# Altium PCB Bop_It.PcbDoc
Units mm, origin at the board's own origin, x right, y up, seen from the top; angles counter-clockwise.
Board outline 37 x 44 mm, 4 copper layers (Top Layer, Ground Plane, Power Plane, Bottom Layer), stack 0.776 mm thick; 13 components, 26 nets, 57 pads, 38 vias.
Unrouted connection lines stored in the file: 10.
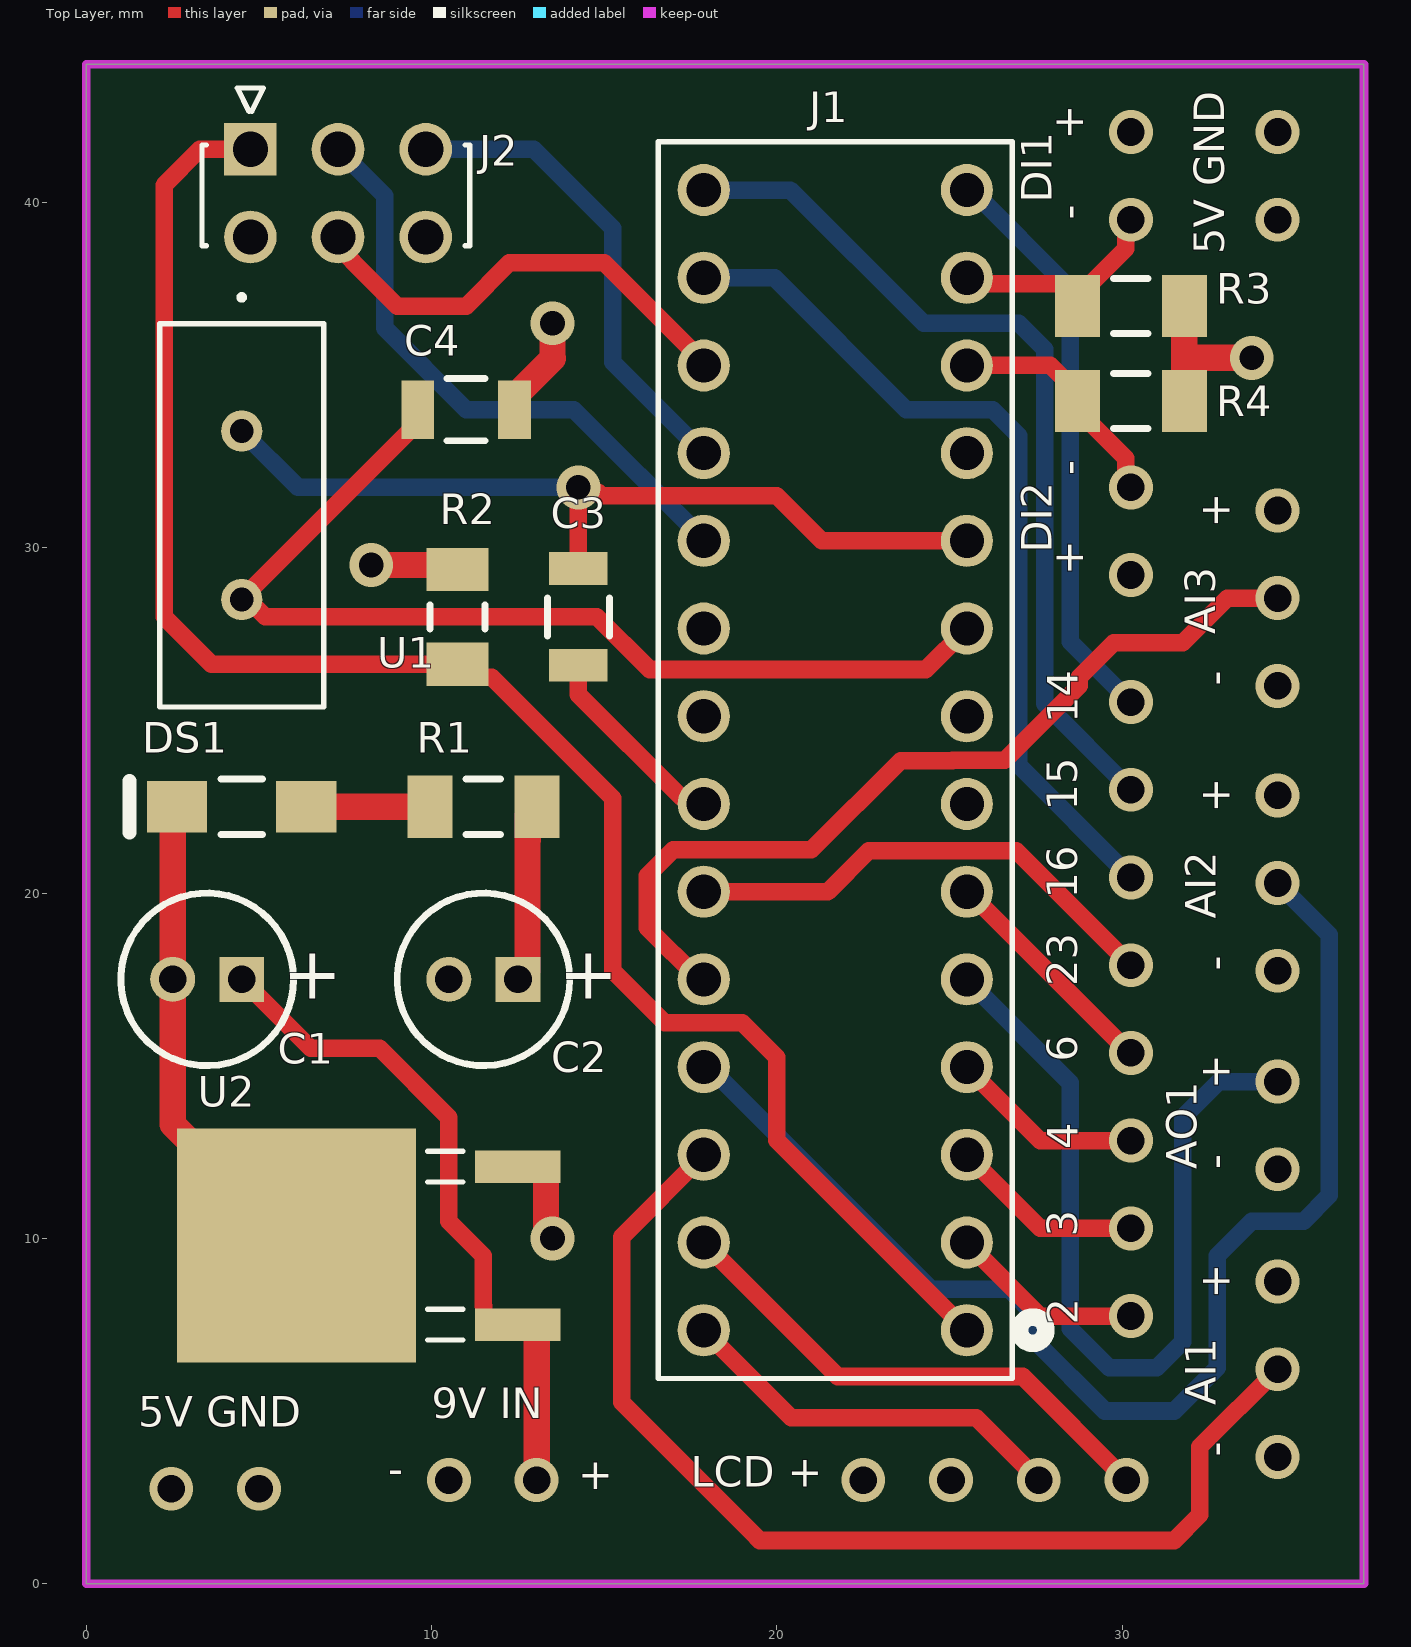
[diagram p0: Top Layer view]
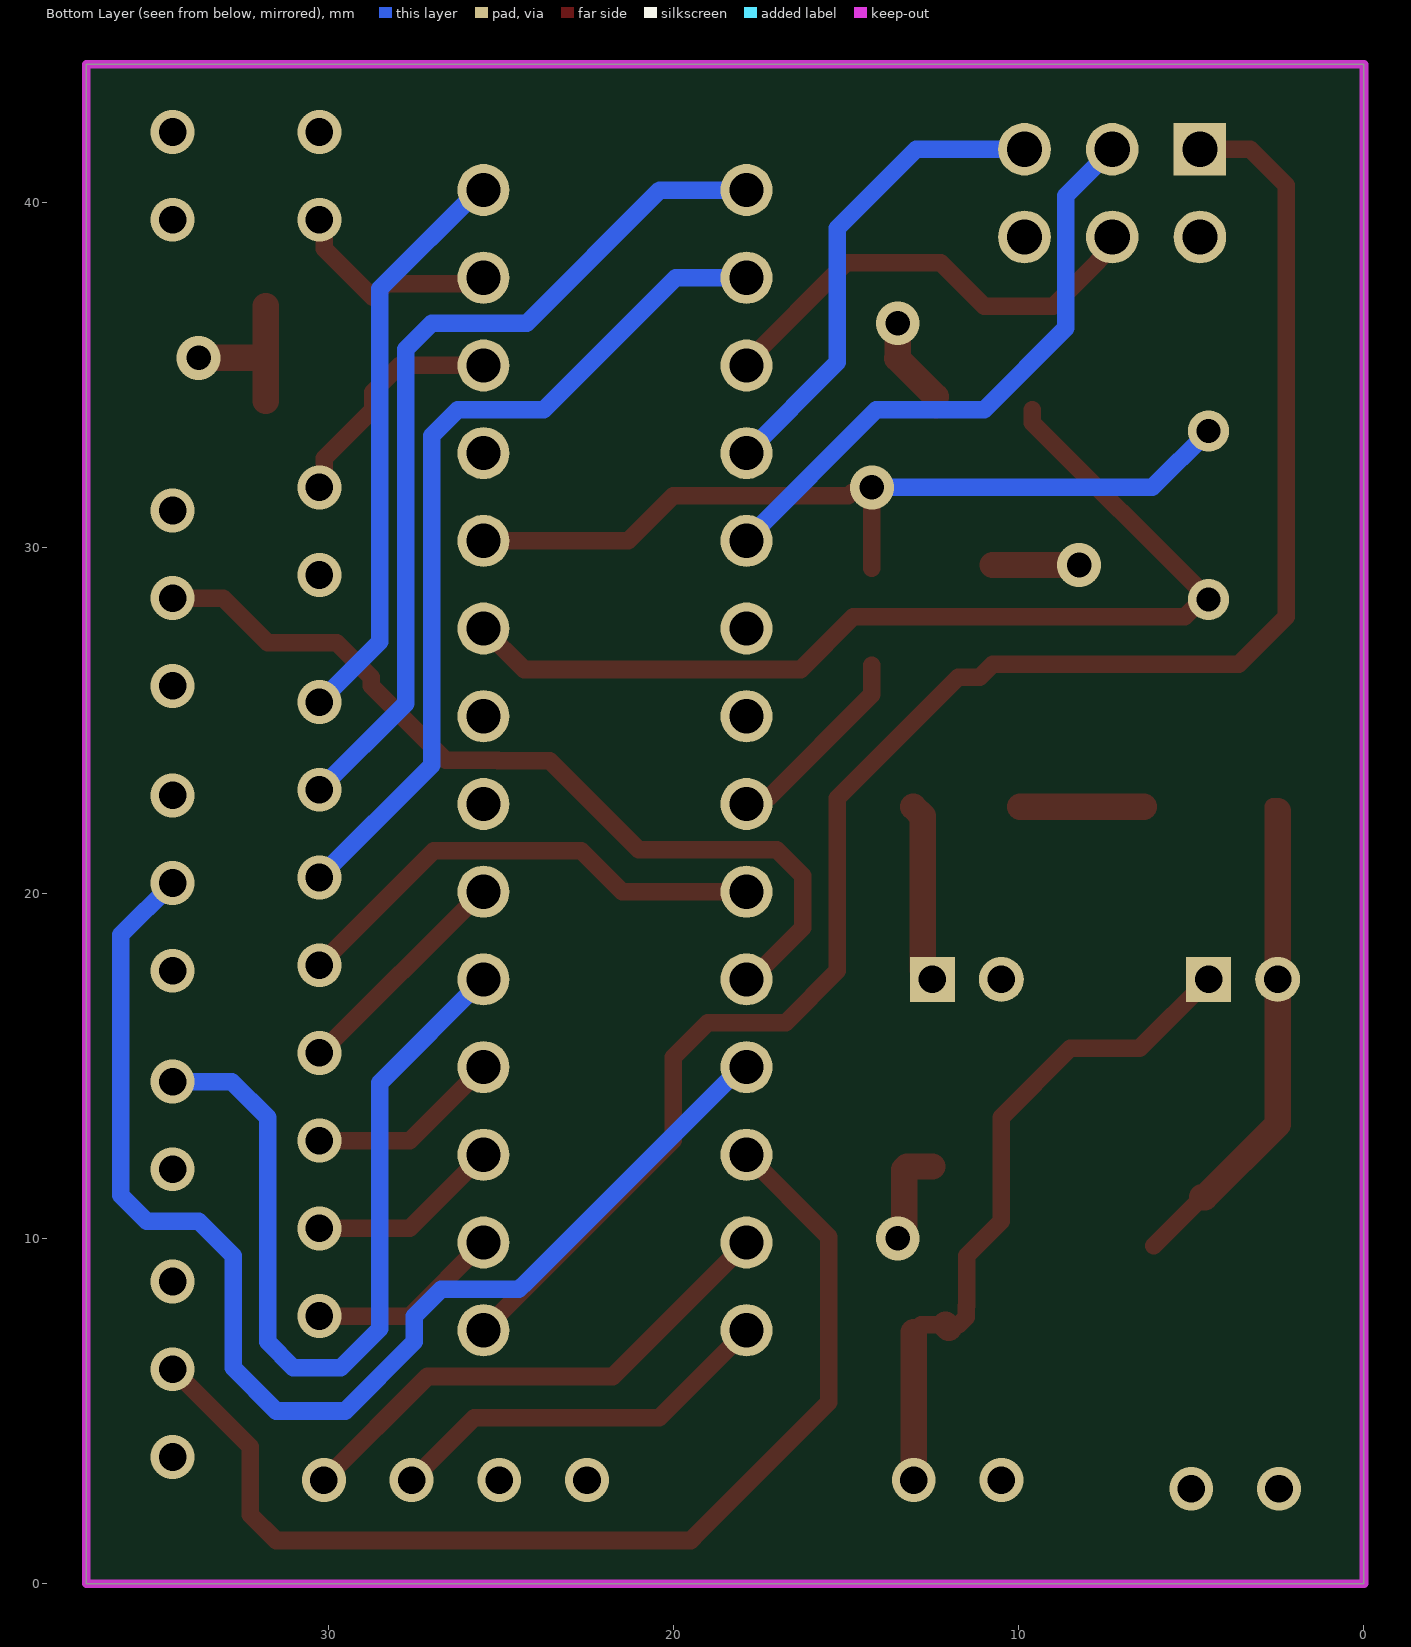
[diagram p1: Bottom Layer view, seen from below]
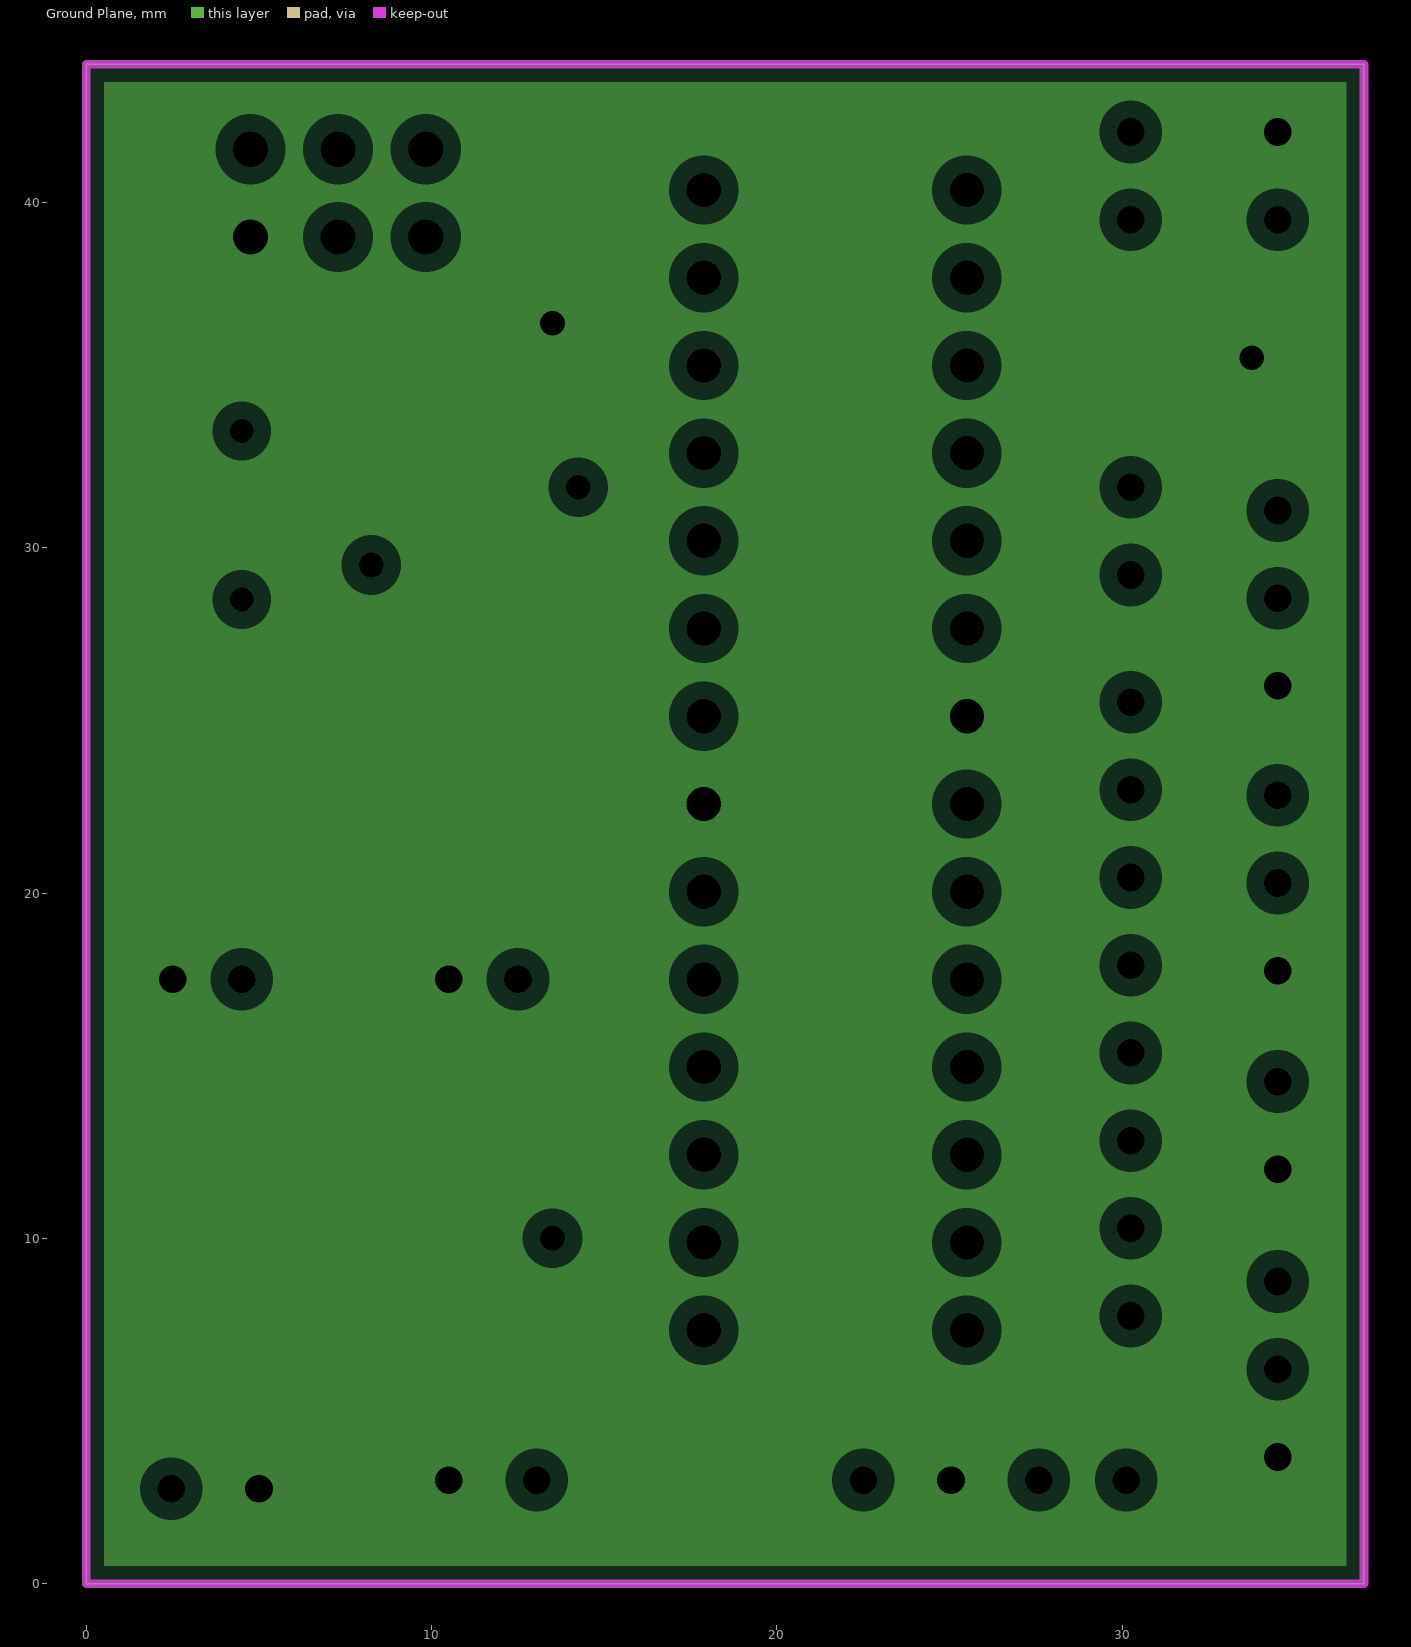
[diagram p2: Ground Plane, clearances drawn from the general rule]
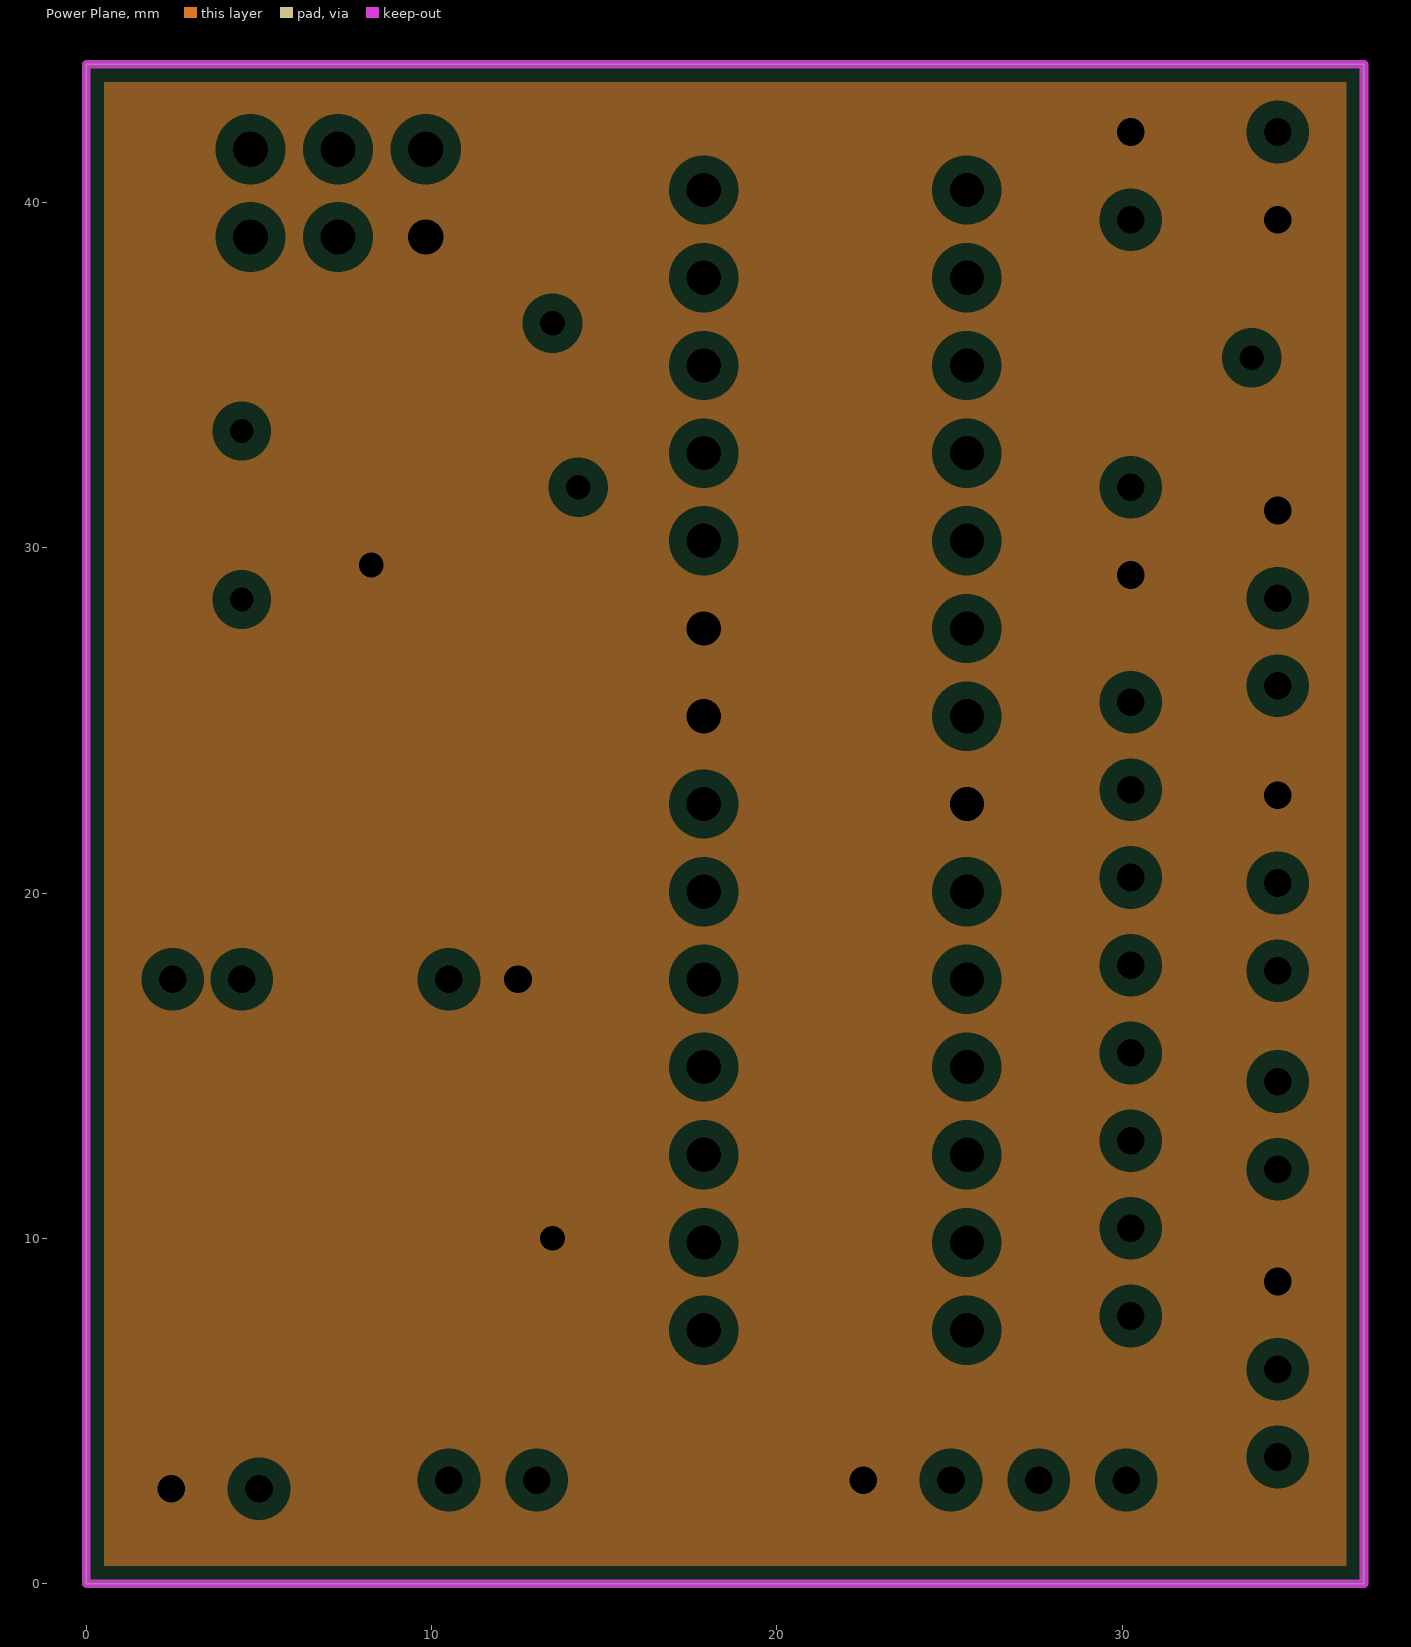
[diagram p3: Power Plane, clearances drawn from the general rule]

## Layer stack, top to bottom
Top Solder: solder mask 0.0102, Solder Resist, Dk 3.5
Top Layer: signal copper 0.0356
Dielectric 2: prepreg 0.254, PP-006, Dk 4.1
Ground Plane: plane copper 0.035, net GND
Dielectric 1: dielectric 0.127, FR-4, Dk 4.8
Power Plane: plane copper 0.035, net 5V
Dielectric 3: prepreg 0.254, PP-006, Dk 4.1
Bottom Layer: signal copper 0.0356
Bottom Solder: solder mask 0.0102, Solder Resist, Dk 3.5

## Board outline
0,0 37,0 37,44 0,44

## Design rules (kind name [scope] priority, off if disabled: settings)
BoardOutlineClearance [All] p1: gap=0.305 ignorepadtopadclearanceinfootprint=FALSE
Clearance [All] p1: gap=0.178 ignorepadtopadclearanceinfootprint=TRUE except(0.61: Arc-Via Track-Via SMDPad-Via THPad-Via Via-Via Via-Fill Via-Poly Via-Region Via-Text Via-Hole)
DiffPairsRouting [All] p1: maxlimit=0.254 minlimit=0.178 mostfreqgap=0.254 toplayer_minwidth=0.152 toplayer_maxwidth=0.381 toplayer_prefwidth=0.203 bottomlayer_minwidth=0.152 bottomlayer_maxwidth=0.381 bottomlayer_prefwidth=0.203 maxuncoupledlength=12.7
HoleToHoleClearance [All] p1: gap=0.432 allowstackedmicrovias=TRUE
NetAntennae [InNet('No Net')] p1: netantennaetolerance=0
PlaneClearance [All] p1: clearance=0.508
PlaneConnect [All] p1: planeconnectstyle=Relief reliefexpansion=0.508 reliefentries=4 reliefconductorwidth=0.254 reliefairgap=0.254
PolygonConnect [All] p1: connectstyle=Relief reliefconductorwidth=0.254 reliefentries=4 polygonreliefangle="90 Angle" airgapwidth=0.254
RoutingVias [All] p1: holewidth=0.762 width=0.889 viastyle="Through Hole" minholewidth=0.254 minwidth=0.279 maxholewidth=6.477 maxwidth=6.35
SilkToSilkClearance [All] p1: silktosilkclearance=0
SolderMaskExpansion SolderMaskExpansion_1 [All] p1: expansion=0.102 istentingtop=FALSE
Width [All] p1: maxlimit=254 minlimit=0.178 preferedwidth=0.508 minimp=50.000000 maximp=50.000000 favimp=50.000000
24 further rules are at their usual default settings.

## Components (designator, comment, footprint, x,y, rotation, side; value= is the part's Value field where it differs from the comment)
C1 "10uF" CAPPR55-200-1100X500X1200 3.5,17.5 r180 top
C2 "10uF" CAPPR55-200-1100X500X1200 11.5,17.5 r180 top
C3 "22pF" FP-C1206C-EB-MFG 14.25,28 r90 top value="22 pF"
C4 "22pF" FP-C1206C-EB-MFG 11,34 r180 top value="22 pF"
DS1 "GRN LED" KING-APTD3216CGCK_V 4.5,22.5 r180 top
J1 "ATMega328" CONN28_1-2199298-9_TEC 25.5,7.34 r90 top
J2 "AVR" CON50_1X50_P100RM_HDR_TYC 4.75,41.54 r0 top
R1 "220" RESC3216X60X45ML10T20 11.5,22.5 r180 top
R2 "10k" RESC3116X65X50NL20T20 10.75,28 r270 top
R3 "100" RESC3216X60X45ML10T20 30.25,37 r180 top
R4 "100" RESC3216X60X45ML10T20 30.25,34.25 r180 top
U1 "16MHz" ATS08A-E_CTS 4.5,33.38 r270 top
U2 "5VREG" DPAK-3_ONS 6.087,9.79 r90 top

## Footprints (in the part's own frame and the unit in brackets; to place one, negate y for a bottom-side part, rotate by r counter-clockwise, add the part's x,y. Pads: shape width x height; smd on the part's side, far side on the other; paste and mask are expansions set on the pad)
ATS08A-E_CTS [mil]
  round 47 hole 27 mask+0: 1(0,0) 2(192.13,0)
  silkscreen extent -155,-94 315,93, body extent 0,0 10,10, height 10
CAPPR55-200-1100X500X1200 [mm] "THD, 2-Leads, Dia 5mm, Body Length 11mm"
  rect 1.3x1.3 hole 0.8: 1(-1,0)
  round 1.3 hole 0.8: 2(1,0)
  silkscreen extent -2.5,-2.5 2.5,2.5, body extent -2.5,-2.5 2.5,2.5, height 12
CON50_1X50_P100RM_HDR_TYC [mil]
  rect 60x60 hole 40 mask+0: 1(0,0)
  round 60 hole 40 mask+0: 2(100,0) 3(200,0) 4(0,-100) 5(100,-100) 6(200,-100)
  silkscreen extent -55,-110 250,70, body extent 0,0 10,10, height 10
CONN28_1-2199298-9_TEC [mil]
  round 59.37 hole 39 mask+0: 1(0,0) 2(100,0) 3(200,0) 4(300,0) 5(400,0) 6(500,0) 7(600,0) 8(700,0) 9(800,0) 10(900,0) 11(1000,0) 12(1100,0) 13(1200,0) 14(1300,0) 15(0,300) 16(100,300) 17(200,300) 18(300,300) 19(400,300) 20(500,300) 21(600,300) 22(700,300) 23(800,300) 24(900,300) 25(1000,300) 26(1100,300) 27(1200,300) 28(1300,300)
  silkscreen extent -55,-90 1355,352, body extent 0,0 10,10, height 10
DPAK-3_ONS [mil]
  rect 36.97x97.56 smd paste+0 mask+0: 1(-90.16,-252.5) 3(90.16,-252.5)
  rect 267x273 smd paste+0 mask+0: 2(0,0)
  silkscreen extent -108,-190 108,-150, body extent 0,0 10,10, height 10
FP-C1206C-EB-MFG [mm]
  rect 0.95x1.7 smd paste+0 mask+0: 1(-1.4,0) 2(1.4,0)
  silkscreen extent -0.55,-0.9 0.55,0.9, body extent -2,-1 2,1, height 0.25
KING-APTD3216CGCK_V [mm] "SMD, 2-Leads, Body 3.2x1.6mm"
  rect 1.75x1.5 smd: 1(-1.875,0) 2(1.875,0)
  silkscreen extent -0.6,-0.8 3.25,0.8, body extent -1.6,-0.8 1.6,0.8, height 1.8
RESC3116X65X50NL20T20 [mm] "Chip Resistor, 2-Leads, Body 3.10x1.60mm, IPC Medium Density"
  rect 1.25x1.8 smd: 1(-1.375,0) 2(1.375,0)
  silkscreen extent -0.35,-0.8 0.35,0.8, body extent -1.65,-0.9 1.65,0.9, height 0.65
RESC3216X60X45ML10T20 [mm] "Chip Resistor, 2-Leads, Body 3.20x1.60mm, IPC Low Density"
  rect 1.3x1.8 smd: 1(-1.55,0) 2(1.55,0)
  silkscreen extent -0.5,-0.8 0.5,0.8, body extent -1.65,-0.85 1.65,0.85, height 0.6

## Part data
C1 C2: library part CMP-2100-03622-1, "Aluminum Electrolytic Capacitor, 10 uF, +/- 20%, 50 V, -40 to 85 degC, 2-Pin THD, RoHS, Bulk", Case/Package=Radial, Dielectric Material=Aluminium, Leakage Current=3uA, Manufacturer=Panasonic, Max Operating Temperature=85degC, Min Operating Temperature=-40degC, Package Description="2-Pin Radial Lead, Dia 5 mm, Height 12 mm", Package Quantity=200, Package Reference=CAPPR55-200-1100X500X1200, Ripple Current=65mA, Tolerance=20%, Voltage=50V, Capacitance=10uF, Datasheet URL=https://industrial.panasonic.com/cdbs/www-data/pdf/RDF0000/ABA0000C1218.pdf, Datasheet Version="Rev. 05, 10/2016", Diameter=5mm, Dissipation Factor=0.12%, Height=11mm, Height - Seated (Max)=0.472inch, Lead Diameter=0.5mm, Lead Free=LeadFree, Lead Pitch=2mm, Lead/Base Style=Straight, Length=11mm, Life (Hours)=2000Hour, Manufacturer URL=http://www.panasonic.com/, Mount=ThroughHole, Number of Pins=2, Packaging=Bulk, Radiation Hardening=No, REACH SVHC=NoSVHC, Ripple Current (AC)=65mA, RoHSCompliant=true, Termination=Radial, Voltage Rating=50V, Voltage Rating (DC)=50V
C3 C4: library part CMP-03020-001476-1, "1206 22pF Ceramic Multilayer Capacitor; 50VDC; 125degC; C0G Dielec; +/-5% SMD", Capacitance="22 pF", Manufacturer=KEMET, Manufacturer Part Number=C1206C220J5GACTU, Package=C1206C-EB, Temperature="-55°C to +150°C", Temperature Characteristic=C0G, Temperature Coefficient=15%, Temperature Range High=+150°C, Temperature Range Low=-55°C, Tolerance=0.05, Voltage Rating="50 V", Automotive=Yes, Automotive Grade="Grade 0", Category=Cap, ComponentLink2Description=Datasheet, ComponentLink2URL=https://content.kemet.com/datasheets/KEM_C1007_X8R_ULTRA_150C_SMD.pdf, Device Class L1="Passive Components", Device Class L2=Capacitors, Device Class L3="Ceramic Capacitors", Digikey Description="1206 22pF Ceramic Multilayer Capacitor; 50VDC; 125degC; C0G Dielec; +/-5% SMD", Height=0.88mm, Ipc Land Pattern Name=CAPC320160X78, Lead Free=Yes, Material=Ceramic, Mouser Description="1206 22pF Ceramic Multilayer Capacitor; 50VDC; 125degC; C0G Dielec; +/-5% SMD", Octopart=https://octopart.com/c1206c220j5gactu-kemet-131912, RoHS=TRUE
DS1: library part CMP-2000-05792-1, "Chip LED Lamp, Green, 5 V, 30 mA, -40 to 85 degC, 2-Pin SMD, RoHS, Tape and Reel", Color=Green, Current - Test=20mA, Manufacturer=Kingbright, Millicandela Rating=300mcd, Package / Case=1206(3216Metric), Package Description="2-Pin Surface Mount Device, Body 3.2 x 1.6 mm", Package Reference=APTD3216CGCK, Standard Package=2,000, Voltage - Forward (Vf) (Typ)=2.1V, 3D Model="APTD3216x.sldprt /  / APTD3216x.pro /  / APTD3216x.igs /  / APTD3216x.stp", Catalog Drawings="APTD3216SeriesTop /  / APTD3216SeriesSide", Category=Optoelectronics, Datasheet URL=https://www.kingbrightusa.com/images/catalog/spec/APTD3216CGCK.pdf, Datasheet Version="Rev. V.17B, 04/2015", Family=LEDIndication-Discrete, Height=1.80mm, Lens Style/Size=RoundwithDomedTop,1.6mm, Lens Type=Clear, Manufacturer URL=http://www.kingbright.com/, Mounting Technology=SurfaceMount, Mounting Type=SurfaceMount, Online Catalog=3.2mmx1.6mmRoundwithDomedTop1206PackageLEDs, Other Names=754-1152-2, Packaging=Tape&Reel(TR), Size / Dimension=3.20mmLx1.60mmW, Viewing Angle=50°, Wavelength - Dominant=570nm, Wavelength - Peak=574nm
J1: library part 1-2199298-9, "28P,DIP SKT,300 CL,LDR,PB FREE", Built_By=Digital_Papaya_Team, Copyright="Copyright (C) 2018 Accelerated Designs. All rights reserved", Datasheet=https://www.te.com/commerce/DocumentDelivery/DDEController?Action=showdoc&DocId=Customer+Drawing%7F2199298%7FA%7Fpdf%7FEnglish%7FENG_CD_2199298_A_baseFilename.pdf%7F1-2199298-1, Manufacturer_Part_Number=1-2199298-9, PITCH(MM)=2.54, POSITIONS=28, PRODUCT=Socket, RefDes=RefDes, ROWS/CONFIG=2, SourceLibrary=TE-Connectivity_250_Part_Delivery_10_2019-04-09, TE_Part_Number=1-2199298-9, Type=DEV, Vendor="TE Connectivity"
J2: library part 5-826631-0, "No Description Available", Built_By=EMA_UL_Team, Copyright="Copyright (C) 2018 Accelerated Designs. All rights reserved", Manufacturer_Part_Number=5-826631-0, RefDes=RefDes, SourceLibrary=Tyco_2012-04-26, Type=DEV, Vendor="TE Connectivity"
R1: library part CMP-2003-01956-1, Manufacturer="Vishay Dale", Part Number=CRCW1206220RFKEA
R2: library part CMP-2003-04883-1, Manufacturer="Vishay Dale", Part Number=CRCW120610K0FKEAHP
R3 R4: library part CMP-2003-04801-1, Manufacturer="Vishay Dale", Part Number=CRCW1206100RFKEA
U1: library part ATS08A-E, "No Description Available", Built_By=EMA_Colton, Copyright="Copyright (C) 2018 Accelerated Designs. All rights reserved", Datasheet=https://www.ctscorp.com/wp-content/uploads/ATS-ATSSM.pdf, Manufacturer_Part_Number=ATS08A-E, RefDes=RefDes, SourceLibrary=Add_to_database_2020-10-15, Type=DEV, Vendor="CTS Components"
U2: library part MC7805BDTRKG, "No Description Available", Copyright="Copyright (C) 2016 Accelerated Designs. All rights reserved", Manufacturer_Part_Number=MC7805BDTRKG, RefDes=RefDes, SourceLibrary=ONSemi_2017-12-12_5, Type=DEV, Vendor="ON Semiconductor"

## Via types
v1: diameter 1.27, hole 0.8, Top Layer to Bottom Layer, 33 vias
v2: diameter 1.27, hole 0.711, Top Layer to Bottom Layer, 5 vias

## Nets (pads, with @x,y where several pads share a name; then routed paths per layer and width w, separated by ;. In a path a pad name is that pad's centre, name@x,y a point inside that pad or via, vN(x,y) a via of type N, cw(c..) or ccw(c..) an arc to the next point about the centre after c; other vN are vias at no path point)
5V: C2.1 J1.7 J1.22 J1.23 J2.6 R1.1 R2.1 U2.3 | length 10.6
  Top Layer w0.508: C2.1 C2.1@12.775,17.775
  Top Layer w0.762: v2(8.25,29.5) R2.1@10.75,29.5 ; U2.3 13.225,12.08 13.314,11.992 13.314,10.324 13.5,10.137 v2(13.5,10) ; C2.1@12.775,17.775 12.775,21.535 12.781,21.541 12.781,22.231 R1.1
  other v1: 2.46,2.75 22.5,3 34.5,8.75 34.5,22.83 30.25,29.21 34.5,31.08 34.5,39.5 30.25,42.04
9V: C1.1 U2.1 | length 20
  Top Layer w0.508: C1.1 6.5,15.5 8.5,15.5 10.5,13.5 10.5,10.5 11.5,9.5 11.5,8.052 11.515,8.037 11.515,7.715 11.731,7.5 12.117,7.5 U2.1 12.824,7.5 U2.1@13.04,7.284
  Top Layer w0.762: U2.1@12.029,7.411 U2.1@12.117,7.5 ; v1(13.04,3) U2.1@13.04,7.284
APushIn: J1.13 R3.2 | length 6.3
  Top Layer w0.508: J1.13 25.674,37.646 28.304,37.646 28.7,37.25 30.104,38.654 30.104,39.354 v1(30.25,39.5)
GND: C1.2 C2.2 C3.1 C4.1 DS1.2 J1.8 J1.21 J2.4 R3.1 R4.1 U2.2 | length 27.8
  Top Layer w0.508: DS1.2@2.5,22.375 DS1.2 ; U2.2@4.688,11.188 U2.2 ; C4.1 C4.1@12.4,34.375 ; C3.1 14.25,25.75 17.229,22.771 17.689,22.771 J1.21
  Top Layer w0.762: DS1.2@2.5,22.375 C1.2 2.5,13.3 4.612,11.188 U2.2@4.688,11.188 ; C4.1@12.4,34.375 13.513,35.487 ; 13.5,35.5 v2(13.5,36.5) ; R4.1 31.8,35.625 ; R3.1 31.8,35.625 ; v2(33.75,35.5) 31.925,35.5 31.8,35.625
  other v1: 5,2.75 10.5,3 25.04,3 34.5,3.67 34.5,12 34.5,17.75 34.5,26 34.5,42.04
JPushIn: J1.12 R4.2 | length 6.9
  Top Layer w0.508: J1.12 27.92,35.28 28.7,34.5 R4.2 28.7,34 30.104,32.596 30.104,31.896 v1(30.25,31.75)
JXIn: J1.18 | length 36.8
  Bottom Layer w0.508: J1.18 18.04,14.96 24.251,8.749 24.474,8.526 26.724,8.526 27.5,7.75 27.5,7 29.5,5 31.5,5 32.75,6.25 32.75,9.5 33.75,10.5 35.25,10.5 36,11.25 36,18.79 v1(34.5,20.29)
JYIn: J1.19 | length 25.5
  Top Layer w0.508: J1.19 17.75,17.5 16.25,19 16.25,20.5 17,21.25 21,21.25 23.579,23.829 25.072,23.829 25.088,23.845 26.595,23.845 28.751,26.001 28.751,26.251 29.75,27.25 31.75,27.25 33.04,28.54 v1(34.5,28.54)
NetC3_2: C3.2 J1.10 U1.1 | length 24.7
  Top Layer w0.508: C3.2 v2(14.25,31.75) 14.396,31.604 14.824,31.604 14.929,31.5 20,31.5 21.3,30.2 25.4,30.2 25.45,30.25 J1.10
  Bottom Layer w0.508: U1.1 6.13,31.75 v2(14.25,31.75)
NetC4_2: C4.2 J1.9 U1.2 | length 29.9
  Top Layer w0.508: C4.2 9.6,33.625 4.5,28.525 U1.2 4.686,28.5 5.028,28.157 5.186,28 14.786,28 16.311,26.474 24.314,26.474 J1.9
NetDS1_1: DS1.1 R1.2 | length 3.6
  Top Layer w0.762: DS1.1 R1.2
NetJ1_1: J1.1 J2.1 R2.2 | length 51.6
  Top Layer w0.508: J2.1 3.29,41.54 2.25,40.5 2.25,28 3.625,26.625 R2.2 11.121,26.254 11.746,26.254 15.25,22.75 15.25,17.75 16.75,16.25 19,16.25 20,15.25 20,12.84 J1.1
NetJ1_24: J1.24 J2.2 | length 17.6
  Bottom Layer w0.508: J2.2 8.636,40.194 8.636,36.364 11,34 14.119,34 17.88,30.239 J1.24
NetJ1_25: J1.25 J2.3 | length 14
  Bottom Layer w0.508: J2.3 12.96,41.54 15.25,39.25 15.25,35.37 J1.25
NetJ1_26: J1.26 J2.5 | length 13.4
  Top Layer w0.508: J2.5 7.29,38.725 7.715,38.3 7.715,38.285 9,37 11,37 12.25,38.25 15,38.25 17.88,35.37 J1.26
Pin2: J1.2 | length 5.6
  Top Layer w0.508: J1.2 27.63,7.75 v1(30.25,7.75)
Pin3: J1.3 | length 5.6
  Top Layer w0.508: J1.3 27.63,10.29 v1(30.25,10.29)
Pin4: J1.4 | length 5.6
  Top Layer w0.508: J1.4 27.63,12.83 v1(30.25,12.83)
Pin6: J1.6 | length 6.7
  Top Layer w0.508: J1.6 25.54,20.04 30.21,15.37 v1(30.25,15.37)
Pin14: J1.14 | length 16.9
  Bottom Layer w0.508: J1.14 25.64,40.36 28.5,37.5 28.5,27.28 v1(30.25,25.53)
Pin15: J1.28 | length 25.6
  Bottom Layer w0.508: J1.28 20.39,40.36 24.25,36.5 27,36.5 27.75,35.75 27.75,25.49 v1(30.25,22.99)
Pin16: J1.27 | length 25.2
  Bottom Layer w0.508: J1.27 19.93,37.82 23.75,34 26.25,34 27,33.25 27,23.7 v1(30.25,20.45)
Pin23: J1.20 | length 14.2
  Top Layer w0.508: J1.20 21.478,20.04 22.664,21.226 26.934,21.226 v1(30.25,17.91)
SCL: J1.15 | length 11.5
  Top Layer w0.508: J1.15 20.409,4.811 25.769,4.811 v1(27.58,3)
SDA: J1.16 | length 15.1
  Top Layer w0.508: J1.16 21.76,6 27.12,6 v1(30.12,3)
SpeakOut: J1.5 | length 25.1
  Bottom Layer w0.508: J1.5 28.5,14.5 28.5,7.381 29.629,6.251 31.001,6.251 31.75,7 31.75,13.5 32.79,14.54 v1(34.5,14.54)
SPotIn: J1.17 | length 32
  Top Layer w0.508: J1.17 15.5,10.04 15.5,5.25 19.251,1.499 19.5,1.25 31.5,1.25 32.25,2 32.25,3.96 v1(34.5,6.21)
pads on no net: J1.11

## Polygon pours and split planes (outlines as drawn)
GND on Ground Plane (split plane): 36.49,43.49 36.49,0.51 0.51,0.51 0.51,43.49
5V on Power Plane (split plane): 36.49,43.49 36.49,0.51 0.51,0.51 0.51,43.49

## Keep-outs
Keep-Out Layer:
  the board outline again, w0.254

## Silkscreen, mask and mechanical layers (free items; w line width, h text height)
Top Overlay:
  text "DI1" at 28.25,39.99 h1.5 r90
  text "-     +" at 29.155,39.5 h1.5 r90
  text "5V GND" at 33.25,38.5 h1.5 r90
  text "DI2" at 28.25,29.85 h1.5 r90
  text "+     -" at 29.155,29.21 h1.5 r90
  text "AI3" at 32.983,27.5 h1.5 r90
  text "-           +" at 33.405,26 h1.5 r90
  text "14" at 29,24.92 h1.5 r90
  text "15" at 28.983,22.38 h1.5 r90
  text "16" at 28.983,19.84 h1.5 r90
  text "AI2" at 33,19.25 h1.5 r90
  text "-           +" at 33.405,17.75 h1.5 r90
  text "23" at 28.983,17.299 h1.5 r90
  text "6" at 28.983,15.12 h1.5 r90
  text "4" at 29,12.58 h1.5 r90
  text "AO1" at 32.45,12 h1.5 r90
  text "-     +" at 33.405,12 h1.5 r90
  text "3" at 28.983,10.04 h1.5 r90
  text "2" at 29,7.499 h1.5 r90
  text "AI1" at 33,5.17 h1.5 r90
  text "9V IN" at 10,4.5 h1.5
  text "5V GND" at 1.5,4.25 h1.5
  text "-           +" at 33.405,3.67 h1.5 r90
  text "-" at 8.75,2.612 h1.5
  text "LCD +" at 17.5,2.517 h1.5
  text "+" at 14.25,2.445 h1.5

## Text inside footprints (layer, text, board x,y; h text height)
C1: Top Overlay "+" at 7.408,18.237 h1.5 r180
C2: Top Overlay "+" at 15.408,18.237 h1.5 r180
J1: Mechanical 7 "3rd Mtg Padstyle: c178h178" at 36.469,15.595 h1.27 r90; Mechanical 7 "2nd Mtg Padstyle: c178h178" at 34.564,15.595 h1.27 r90; Mechanical 7 "Alt Padstyle 1: b152_229h76" at 42.184,15.278 h1.27 r90; Mechanical 7 "Left Mtg Padstyle: c152h76" at 38.374,15.595 h1.27 r90; Mechanical 7 "Default Padstyle: c151h99" at 30.754,15.913 h1.27 r90; Mechanical 7 "1st Mtg Padstyle: c203h127" at 32.659,15.595 h1.27 r90; Mechanical 7 "0.3in/7.62mm" at 22.007,44.678 h0.64 r90; Mechanical 7 "Alt Padstyle 2: b229_152h76" at 44.089,15.278 h1.27 r90; Mechanical 7 "Right Mtg Padstyle: c152h76" at 40.279,15.278 h1.27 r90; Mechanical 7 "0.394in/10mm" at 22.007,-7.392 h0.64 r90; Mechanical 7 "0.197in/5mm" at 19.507,-8.344 h0.64 r90; Mechanical 7 "0.1in/2.54mm" at 14.023,12.42 h0.64 r90; Mechanical 7 "1.4in/35.56mm" at 5.768,21.786 h0.64 r90
U1: Mechanical 7 "Default Pad Style: c119h69" at -4.733,39.195 h1.27 r270; Mechanical 7 "Alt 1 Pad Style: b152_229h76" at -6.638,39.83 h1.27 r270; Mechanical 7 "Alt 2 Pad Style: b229_152h76" at -8.543,39.83 h1.27 r270; Mechanical 7 "0.192in/4.88mm" at -0.161,33.163 h0.64 r270; Mechanical 7 "0.427in/10.846mm" at 8.526,33.48 h0.64 r270; Mechanical 7 "0.177in/4.496mm" at 4.183,26.914 h0.64 r270
U2: Mechanical 7 "Default Padstyle: r94_248" at 22.279,1.853 h1.27 r90; Mechanical 7 "Large Padstyle: r678_693" at 24.184,2.17 h1.27 r90; Mechanical 7 "Alt 1 Padstyle: b152_229h76" at 26.089,1.218 h1.27 r90; Mechanical 7 "Alt 2 Padstyle: b229_152h76" at 27.994,1.218 h1.27 r90; Mechanical 7 "0.245in/6.223mm" at 6.404,16.204 h0.64 r90; Mechanical 7 "0.265in/6.731mm" at -0.073,7.409 h0.64 r90; Mechanical 7 "0.41in/10.414mm" at 9.706,18.744 h0.64 r90; Mechanical 7 "0.07in/1.778mm" at 12.818,-1.068 h0.64 r90; Mechanical 7 "0.18in/4.58mm" at 17.517,7.726 h0.64 r90; Mechanical 13 "*" at 9.579,7.183 h1.27 r90